# Allegro board delay.brd
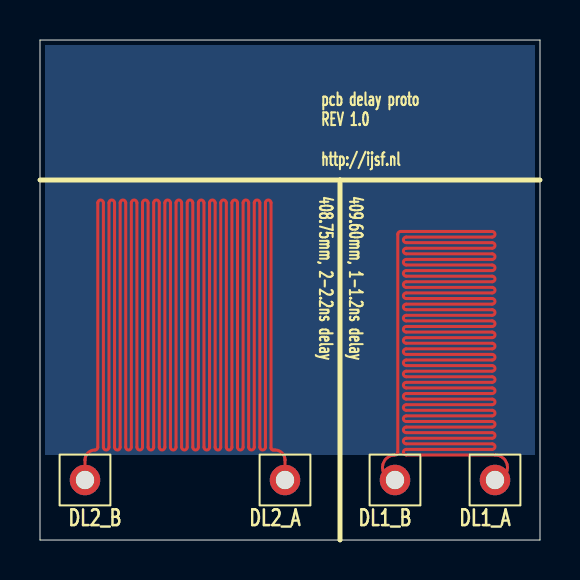
[diagram p0: board, top side]
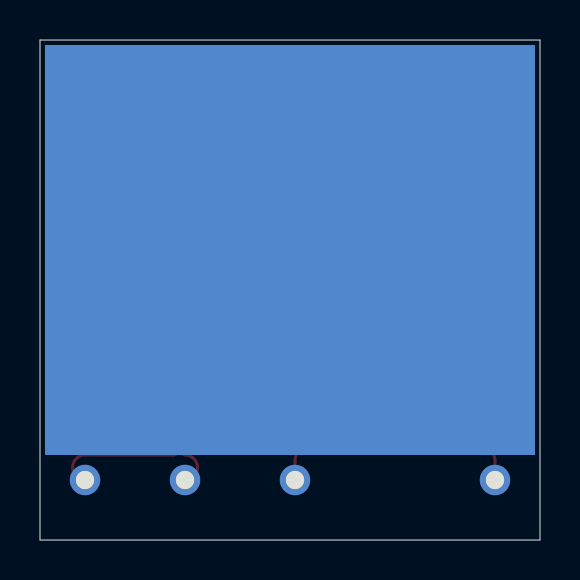
[diagram p1: board, bottom side, seen from below]

Outline 25 x 25 mm; copper layers: TOP, BOTTOM. Coordinates in mm from the lower left corner of the outline.
Outline path: 0,25 25,25 25,0 0,0 0,25

## Placement (name value [footprint] x y rotation side)
DL1_A  A  [HEADER1]  22.75 3 0 top
DL1_B  B  [HEADER1]  17.75 3 0 top
DL2_A  A  [HEADER1]  12.25 3 0 top
DL2_B  B  [HEADER1]  2.25 3 0 top

## Library data of the parts
DL1_A DL1_B DL2_A DL2_B = HEADER 1

## Footprints (pads in the part's own frame, mm; a bottom-side part is the same pattern mirrored in y, then rotated)
HEADER1
  round 1.524 hole 0.914: 1(0,0)

## Nets
N00052: DL1_A.1 DL1_B.1
N00737: DL2_A.1 DL2_B.1

## Routing (per net, layer and track width the routed paths; a pad name or vN(x,y) marks a point on that pad's centre or on a via; arc(x,y) is an arc through that point)
N00052: length 209.6
  TOP w0.152: DL1_A.1 arc(23.38,3.62) 22.75,4.25 18.31,4.25 arc(18.17,4.39) 18.31,4.53 22.61,4.53 arc(22.75,4.67) 22.61,4.81 18.31,4.81 arc(18.17,4.95) 18.31,5.09 22.61,5.09 arc(22.75,5.23) 22.61,5.37 18.31,5.37 arc(18.17,5.51) 18.31,5.65 22.61,5.65 arc(22.75,5.79) 22.61,5.93 18.31,5.93 arc(18.17,6.07) 18.31,6.21 22.61,6.21 arc(22.75,6.35) 22.61,6.49 18.31,6.49 arc(18.17,6.62) 18.31,6.76 22.61,6.76 arc(22.75,6.9) 22.61,7.04 18.31,7.04 arc(18.17,7.18) 18.31,7.32 22.61,7.32 arc(22.75,7.46) 22.61,7.6 18.31,7.6 arc(18.17,7.74) 18.31,7.88 22.61,7.88 arc(22.75,8.02) 22.61,8.16 18.31,8.16 arc(18.17,8.3) 18.31,8.44 22.61,8.44 arc(22.75,8.58) 22.61,8.72 18.31,8.72 arc(18.17,8.86) 18.31,9 22.61,9 arc(22.75,9.14) 22.61,9.28 18.31,9.28 arc(18.17,9.42) 18.31,9.56 22.61,9.56 arc(22.75,9.7) 22.61,9.84 18.31,9.84 arc(18.17,9.98) 18.31,10.12 22.61,10.12 arc(22.75,10.26) 22.61,10.4 18.31,10.4 arc(18.17,10.54) 18.31,10.68 22.61,10.68 arc(22.75,10.82) 22.61,10.96 18.31,10.96 arc(18.17,11.1) 18.31,11.23 22.61,11.23 arc(22.75,11.37) 22.61,11.51 18.31,11.51 arc(18.17,11.65) 18.31,11.79 22.61,11.79 arc(22.75,11.93) 22.61,12.07 18.31,12.07 arc(18.17,12.21) 18.31,12.35 22.61,12.35 arc(22.75,12.49) 22.61,12.63 18.31,12.63 arc(18.17,12.77) 18.31,12.91 22.61,12.91 arc(22.75,13.05) 22.61,13.19 18.31,13.19 arc(18.17,13.33) 18.31,13.47 22.61,13.47 arc(22.75,13.61) 22.61,13.75 18.31,13.75 arc(18.17,13.89) 18.31,14.03 22.61,14.03 arc(22.75,14.17) 22.61,14.31 18.31,14.31 arc(18.17,14.45) 18.31,14.59 22.61,14.59 arc(22.75,14.73) 22.61,14.87 18.31,14.87 arc(18.17,15.01) 18.31,15.15 22.61,15.15 arc(22.75,15.29) 22.61,15.43 18.03,15.43 arc(17.93,15.39) 17.89,15.29 17.89,4.39 arc(17.85,4.29) 17.75,4.25 arc(17.12,3.62) DL1_B.1
N00737: length 408.8
  TOP w0.152: DL2_A.1 12.25,4 arc(12.1,4.35) 11.75,4.5 11.65,4.5 arc(11.58,4.53) 11.55,4.6 11.55,16.86 arc(11.41,17) 11.27,16.86 11.27,4.64 arc(11.13,4.5) 10.99,4.64 10.99,16.86 arc(10.85,17) 10.71,16.86 10.71,4.64 arc(10.57,4.5) 10.43,4.64 10.43,16.86 arc(10.29,17) 10.15,16.86 10.15,4.64 arc(10.01,4.5) 9.87,4.64 9.87,16.86 arc(9.73,17) 9.6,16.86 9.6,4.64 arc(9.46,4.5) 9.32,4.64 9.32,16.86 arc(9.18,17) 9.04,16.86 9.04,4.64 arc(8.9,4.5) 8.76,4.64 8.76,16.86 arc(8.62,17) 8.48,16.86 8.48,4.64 arc(8.34,4.5) 8.2,4.64 8.2,16.86 arc(8.06,17) 7.92,16.86 7.92,4.64 arc(7.78,4.5) 7.64,4.64 7.64,16.86 arc(7.5,17) 7.36,16.86 7.36,4.64 arc(7.22,4.5) 7.08,4.64 7.08,16.86 arc(6.94,17) 6.8,16.86 6.8,4.64 arc(6.66,4.5) 6.52,4.64 6.52,16.86 arc(6.38,17) 6.24,16.86 6.24,4.64 arc(6.1,4.5) 5.96,4.64 5.96,16.86 arc(5.82,17) 5.68,16.86 5.68,4.64 arc(5.54,4.5) 5.4,4.64 5.4,16.86 arc(5.26,17) 5.12,16.86 5.12,4.64 arc(4.99,4.5) 4.85,4.64 4.85,16.86 arc(4.71,17) 4.57,16.86 4.57,4.64 arc(4.43,4.5) 4.29,4.64 4.29,16.86 arc(4.15,17) 4.01,16.86 4.01,4.64 arc(3.87,4.5) 3.73,4.64 3.73,16.86 arc(3.59,17) 3.45,16.86 3.45,4.64 arc(3.31,4.5) 3.17,4.64 3.17,16.86 arc(3.03,17) 2.89,16.86 2.89,4.64 arc(2.85,4.54) 2.75,4.5 arc(2.4,4.35) 2.25,4 DL2_B.1

## Copper pours and planes (outline as drawn; the poured copper is in the pictures)
Net_3 on BOTTOM (solid shape): 24.75,4.25 0.25,4.25 0.25,24.75 24.75,24.75

## Text on the board
Ref Des/Silkscreen Top: pcb delay proto | REV 1.0 | http://ijsf.nl | 408.75mm, 2-2.2ns delay | 409.60mm, 1-1.2ns delay
